# Altium PCB TutorialBoard.PcbDoc
Units mil, origin at the board's own origin, x right, y up, seen from the top; angles counter-clockwise.
Board outline 1775 x 1775 mil, 2 copper layers (Top Layer, Bottom Layer); 18 components, 14 nets, 50 pads, 0 vias.
Unrouted connection lines stored in the file: 3.
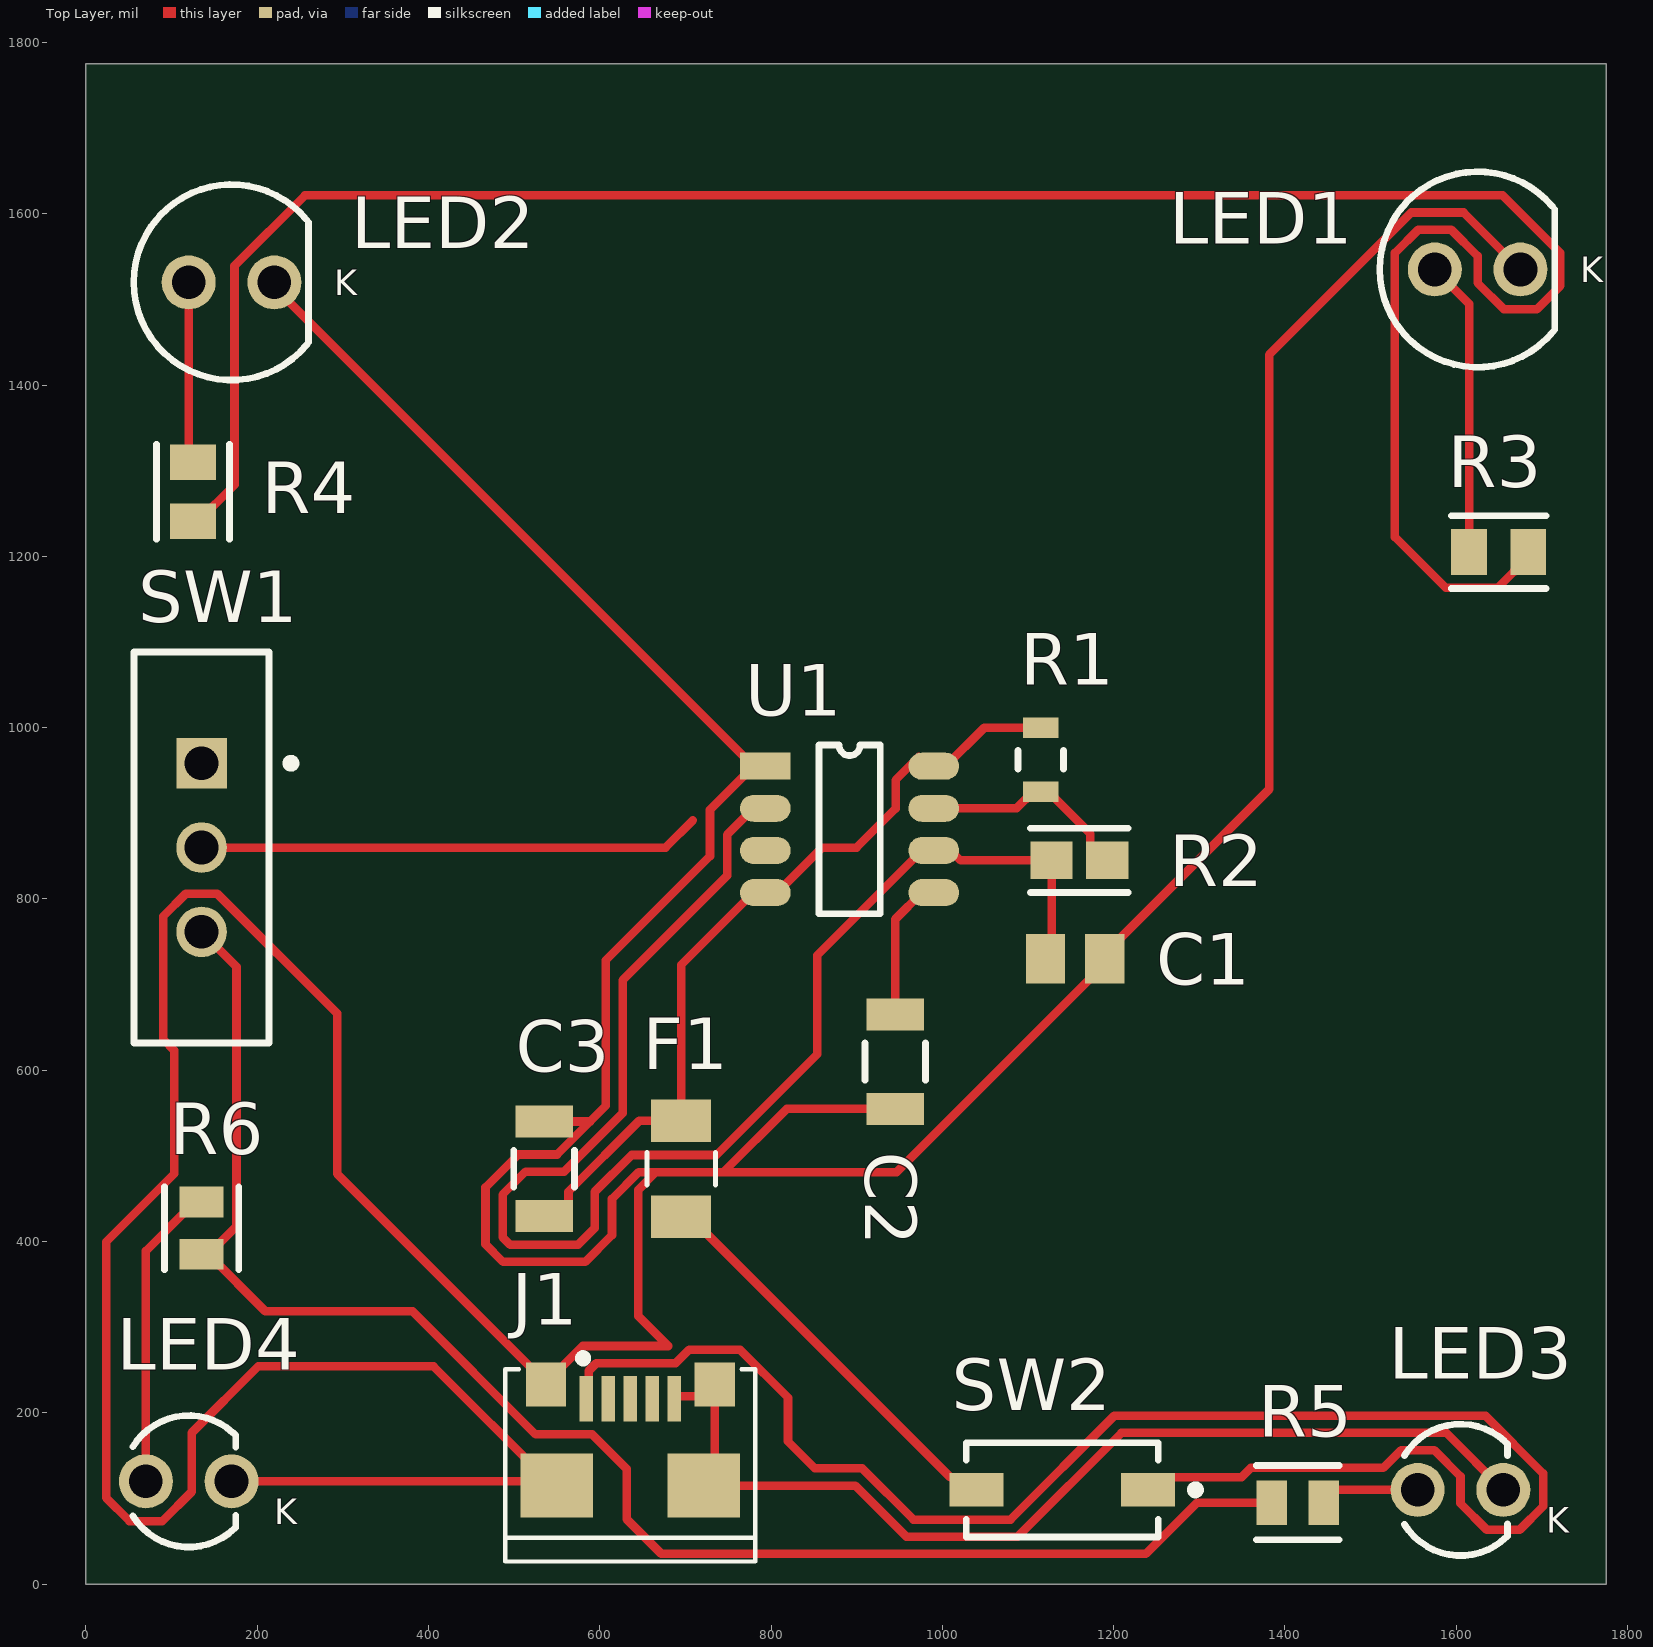
[diagram p0: Top Layer view]
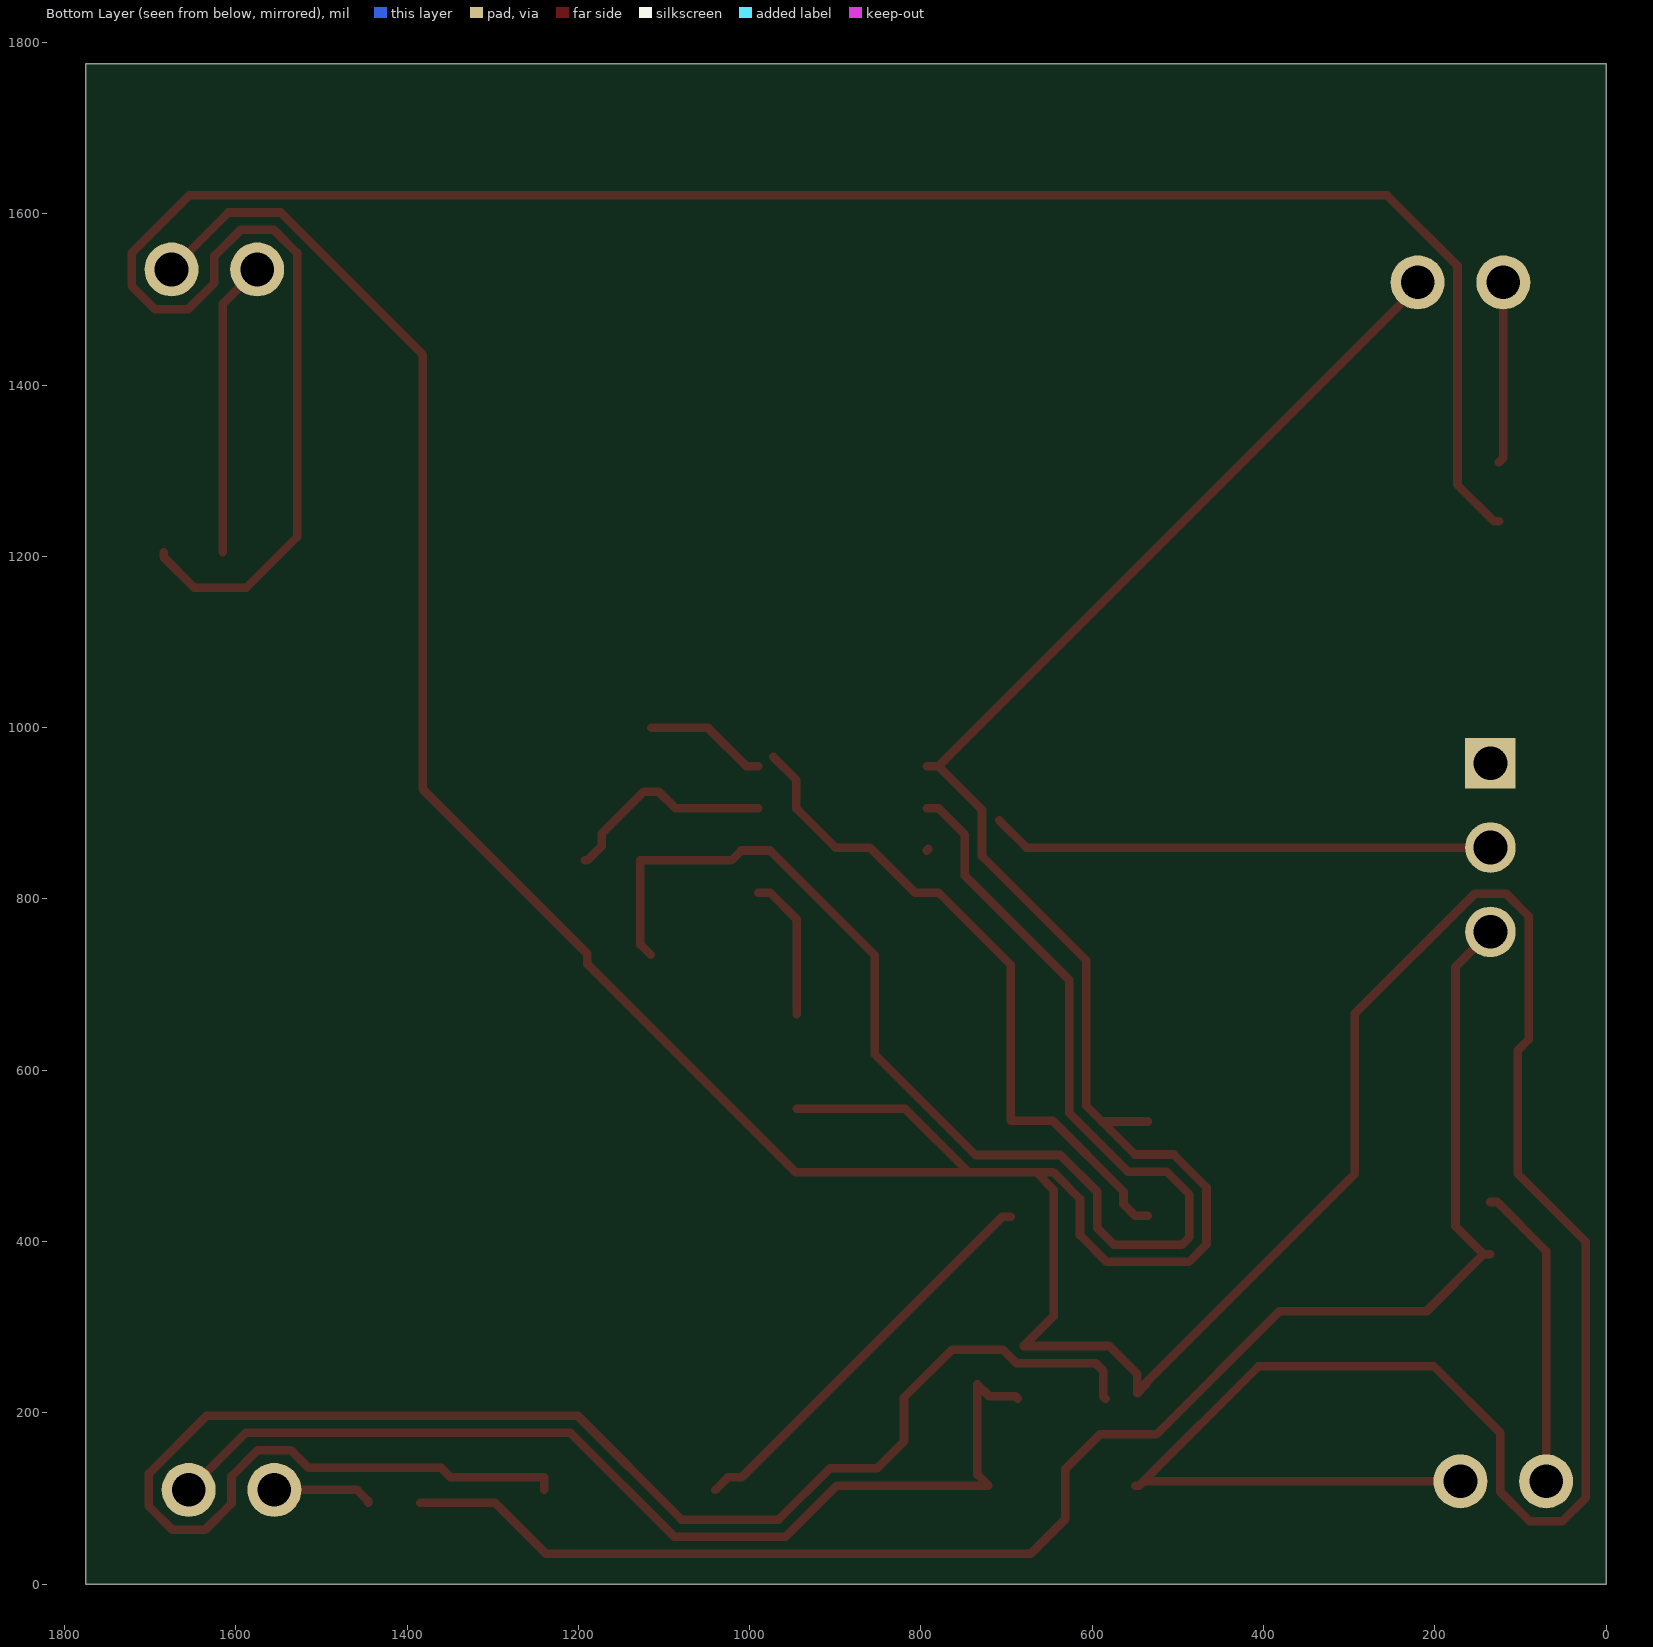
[diagram p1: Bottom Layer view, seen from below]
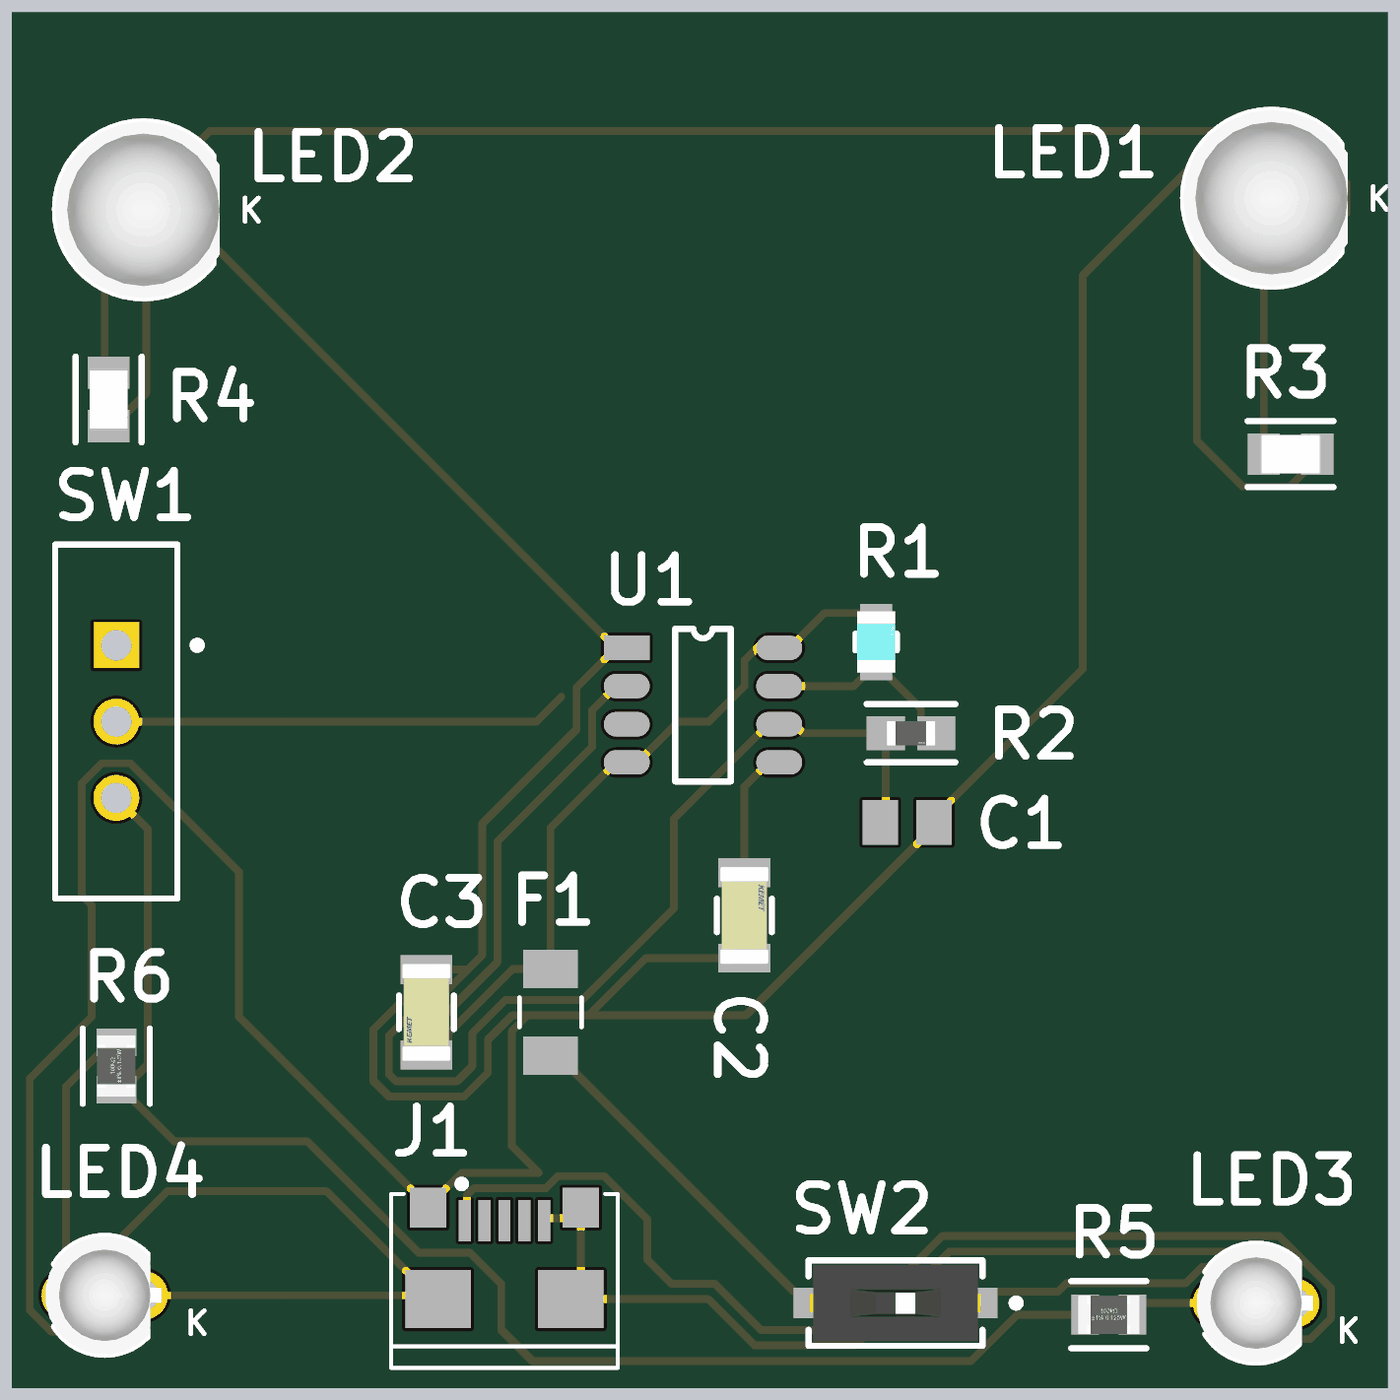
[diagram p2: 3D render of the assembled board from above, using the file's embedded part models]

## Layer stack, top to bottom
Top Solder: solder mask 0.4, Solder Resist, Dk 3.5
Top Layer: signal copper 1.4
Dielectric 1: dielectric 12.6, FR-4, Dk 4.8
Bottom Layer: signal copper 1.4
Bottom Solder: solder mask 0.4, Solder Resist, Dk 3.5

## Board outline
0,0 0,1775 1775,1775 1775,0

## Design rules (kind name [scope] priority, off if disabled: settings)
Clearance [All] p1: gap=10 ignorepadtopadclearanceinfootprint=FALSE except(0: Arc-Hole Track-Hole SMDPad-Hole THPad-Hole Via-Hole Fill-Hole Poly-Hole Region-Hole Text-Hole)
PolygonConnect [All] p1: connectstyle=Relief reliefconductorwidth=10 reliefentries=4 polygonreliefangle="90 Angle" airgapwidth=10
RoutingVias [All] p1: holewidth=28 width=50 viastyle="Through Hole" minholewidth=28 minwidth=50 maxholewidth=28 maxwidth=50
SolderMaskExpansion [All] p1: expansion=4 istentingtop=FALSE
Width [All] p1: maxlimit=10 minlimit=10 preferedwidth=10
30 further rules are at their usual default settings.

## Classes and differential pairs
component class Power: C3 F1 J1 SW2
component class 555_timer: C1 C2 LED1 LED2 LED3 LED4 R1 R2 R3 R4 R5 R6 SW1 U1

## Components (designator, comment, footprint, x,y, rotation, side; value= is the part's Value field where it differs from the comment)
C1 "6.8uF 0805 Capacitor" "Genetic 0805 Capacitor" 1155,730 r180 top value=6.8uF
C2 "C1206C103K5RAC7210" FP-C1206C-EB-MFG 945,610 r270 top value="10,000 pF"
C3 "C1206C103K5RAC7210" FP-C1206C-EB-MFG 535,485 r90 top value="10,000 pF"
F1 "C1F 250" C1_BEL 695,485 r90 top
J1 "DX4R005HJ5R2000" JAE_DX4R005HJ5R2000 635.63,216.38 r0 top
LED1 "151051BS04000" "Type 5mm" 1625,1535 r0 top
LED2 "151051BS04000" "Type 5mm" 170,1520 r0 top
LED3 "151031VS06000" "Type 3mm" 1605,110 r0 top
LED4 "151031VS06000" "Type 3mm" 120,120 r0 top
R1 "RK73H2ATTE1001F" FP-RK73H2A-MFG 1115,962.6 r90 top
R2 "RR0816P-104-D" FP-RR0816-IPC_A 1160,845 r0 top
R3 "CR0805-JW-101ELF" FP-CR0805-IPC_B 1649.53,1205 r180 top
R4 "CR0805-JW-101ELF" FP-CR0805-IPC_B 125,1275.47 r90 top
R5 "CRGCQ0805F120R" FP-CRGCQ0805-IPC_C 1415,95 r0 top value=120Ω
R6 "CRGCQ0805F120R" FP-CRGCQ0805-IPC_C 135,415.55 r90 top value=120Ω
SW1 "EG1218" ESWI-EG1218_V 135,860 r270 top
SW2 "CHS-01TA" FP-CHS-01TA-MFG 1140,110 r180 top
U1 "NE555S-13" NE555S-13 793.35,955 r0 top

## Footprints (in the part's own frame and the unit in brackets; to place one, negate y for a bottom-side part, rotate by r counter-clockwise, add the part's x,y. Pads: shape width x height; smd on the part's side, far side on the other; paste and mask are expansions set on the pad)
C1_BEL [mil]
  rect 50x70 smd paste+0 mask+0: 1(-56,0) 2(56,0)
  silkscreen extent -19,-40 19,40
ESWI-EG1218_V [mm] "THD, 3-Leads, Body 11.6x4mm, Pitch 2.5mm"
  rect 1.5x1.5 hole 1: 1(-2.5,0)
  round 1.5 hole 1: 2(0,0) 3(2.5,0)
  silkscreen extent -5.8,-2 5.8,2.78, body extent -5.8,-2 5.8,2, height 7.4
FP-C1206C-EB-MFG [mm]
  rect 0.95x1.7 smd paste+0 mask+0: 1(-1.4,0) 2(1.4,0)
  silkscreen extent -0.55,-0.9 0.55,0.9, body extent -2,-1 2,1, height 0.25
FP-CHS-01TA-MFG [mm]
  rect 1.6x1 smd paste+0 mask+0: 1(-2.54,0) 2(2.54,0)
  silkscreen extent -4.08,-1.4 2.85,1.4, body extent -3.44,-1.5 3.44,1.5, height 0.25
FP-CR0805-IPC_B [mil]
  rect 41.66x53.63 smd paste+0 mask+0: 1(-34.53,0) 2(34.53,0)
  silkscreen extent -55,-43 55,43, body extent -65,-37 65,37, height 10
FP-CRGCQ0805-IPC_C [mil]
  rect 35.67x51.57 smd paste+0 mask+0: 1(-30.55,0) 2(30.55,0)
  silkscreen extent -48,-43 48,43, body extent -52,-31 52,31, height 10
FP-RK73H2A-MFG [mm]
  rect 0.6x1.05 smd paste+0 mask+0: 1(-0.95,0) 2(0.95,0)
  silkscreen extent -0.28,-0.67 0.28,0.67, body extent -1.35,-0.77 1.35,0.77, height 0.25
FP-RR0816-IPC_A [mil]
  rect 49.41x43.55 smd paste+0 mask+0: 1(-32.51,0) 2(32.51,0)
  silkscreen extent -57,-38 57,38, body extent -77,-41 77,41, height 10
"Genetic 0805 Capacitor" [mm]
  rect 1.16x1.47 smd: 1(-0.88,0) 2(0.88,0)
JAE_DX4R005HJ5R2000 [mm]
  rect 0.4x1.35 smd: 1(-1.3,0) 2(-0.65,0) 3(0,0) 4(0.65,0) 5(1.3,0)
  rect 1.2x1.3 smd: SH1(-2.5,0.425) SH2(2.5,0.425)
  rect 2.15x1.9 smd: SH3(-2.175,-2.575) SH4(2.175,-2.575)
  silkscreen extent -3.71,-4.82 3.71,1.32
NE555S-13 [mm]
  rect 1.505x0.802 smd: 1(0,0)
  oval 1.505x0.802 smd: 2(0,-1.25) 3(0,-2.5) 4(0,-3.75) 5(4.995,-3.75) 6(4.995,-2.5) 7(4.995,-1.25) 8(4.995,0)
  silkscreen extent 1.59,-4.38 3.41,0.63
"Type 3mm" [mm] "THT, LED-3mm, 2pin- Body 4.15mm(max)"
  round 1.6 hole 1: 1(1.27,0) 2(-1.27,0)
  silkscreen extent -1.66,-1.95 1.4,1.95, body extent -1.93,-1.94 1.87,1.94, height 10.5
"Type 5mm" [mm] "THT, LED-5mm, 2pin- Body 5.8mm"
  round 1.6 hole 1: 1(1.27,0) 2(-1.27,0)
  silkscreen extent -2.9,-2.9 2.29,2.9, body extent -2.9,-2.9 2.5,2.9, height 11.7

## Part data
C1: "CAP CER 6.8UF 10V X7S 0805", Package=0805, Supplier Part Number 1=445-16116-1-ND, MF="TDK Corporation", MP=CGA4J3X7S1A685K125AB, Supplier 1=Digi-Key
C2 C3: library part CMP-03020-021901-1, "CAP CER 10000PF 50V X7R 1206", Capacitance="10,000 pF", Manufacturer=KEMET, Package=C1206C-EB, Temperature="-55°C to +150°C", Temperature Characteristic=X7R, Temperature Coefficient=15%, Temperature Range High=+150°C, Temperature Range Low=-55°C, Tolerance=0.1, Voltage Rating="50 V", Automotive=Yes, Automotive Grade="Grade 0", Category=Cap, ComponentLink2Description=Datasheet, ComponentLink2URL=https://content.kemet.com/datasheets/KEM_C1007_X8R_ULTRA_150C_SMD.pdf, Device Class L1="Passive Components", Device Class L2=Capacitors, Device Class L3="Ceramic Capacitors", Digikey Description="CAP CER 10000PF 50V X7R 1206", Height=0.88mm, Ipc Land Pattern Name=CAPC320160X78, Lead Free=Yes, Manufacturer Part Number=C1206C103K5RAC7210, Material=Ceramic, Mouser Description="Multilayer Ceramic Capacitors MLCC - SMD/SMT 50volts 10000pF X7R 10%", Octopart=https://octopart.com/c1206c103k5rac7210-kemet-3918401, RoHS=TRUE
F1: "No Description Available", Mfr_Name=Belfuse, Copyright="Copyright (C) 2022 Ultra Librarian. All rights reserved.", Digi-Key_Part_Number_1=507-1874-1-ND, Digi-Key_Part_Number_2=507-1874-2-ND, Digi-Key_Part_Number_3=507-1874-6-ND, Manufacturer_Part_Number="C1F 250", RefDes=RefDes, Type=DEV
J1: "USB - micro B USB 2.0 Receptacle Connector 5 Position Surface Mount, Right Angle", Package=None, Availability=Unavailable, MF="JAE Electronics", MP=DX4R005HJ5R2000, Price=None, SnapEDA_Link=https://www.snapeda.com/parts/DX4R005HJ5R2000/JAE%20Electronics/view-part/554854/?ref=snap
LED1 LED2: library part CMP-1488-00009-1, "THT LED round mono-color color lens, WL-TMRW, Blue", Emitting color=Blue, Manufacturer="Wuerth Elektronik", ComponentLink1Description="Manufacturer URL", ComponentLink1URL=http://www.we-online.com, ComponentLink2Description=Datasheet, ComponentLink2URL=http://katalog.we-online.de/pbs/datasheet/7448042001.pdfhttp://katalog.we-online.de/pbs/datasheet/7448042001.pdfhttp://katalog.we-online.de/pbs/datasheet/7448042001.pdfhttp://katalog.we-online.de/pbs/datasheet/151051BS04000.pdf, PackageReference="Type 5mm", PartNumber=151051BS04000
LED3 LED4: library part CMP-1488-00004-1, "THT LED round mono-color color lens, WL-TMRC , Bright Green", Emitting color="Bright Green", Manufacturer="Wuerth Elektronik", ComponentLink1Description="Manufacturer URL", ComponentLink1URL=http://www.we-online.com, ComponentLink2Description=Datasheet, ComponentLink2URL=http://katalog.we-online.de/pbs/datasheet/7448042001.pdfhttp://katalog.we-online.de/pbs/datasheet/7448042001.pdfhttp://katalog.we-online.de/pbs/datasheet/7448042001.pdfhttp://katalog.we-online.de/pbs/datasheet/151031VS06000.pdf, PackageReference="Type 3mm", PartNumber=151031VS06000
R1: library part CMP-2001-01881-2, "1kΩ ±1% 0.25W Chip Resistor 0805 Thick Film AEC-Q200 Qualified", Case Code (Imperial)=0805, Case Code (Metric)=2012, Manufacturer Series=RK73H, Max Operating Temperature=155°C, Min Operating Temperature=-55°C, Package Quantity=4000, Package Shape=Rectangular, Power Rating=125mW, Resistance=1kR, Resistor Type="Thick Film", Temperature Coefficient=100ppm/°C, Tolerance=1%, Voltage Rating=150V, Additional Feature=PRECISION, Case/Package=0805, Construction=Rectangular, Depth=1.25mm, Height=0.5mm, Lead Free="Lead Free", Length=2mm, Military Standard=Not, Packaging="Tape and Reel", RoHS Compliant=Yes, Series=RK73H, Size Code=0805, Technology="METAL GLAZE/THICK FILM", Terminal Finish=Tin, Termination=SMD/SMT, Width=1.25mm, Working Voltage=150V
R2: library part CMP-2000-02426-2, "100kΩ ±0.5% 0.0625W 1/16W Chip Resistor 0603 (1608 Metric) Thin Film", Case Code (Imperial)=0603, Case Code (Metric)=1608, Max Operating Temperature=125°C, Max Power Dissipation=63mW, Min Operating Temperature=-55°C, Package Quantity=1, Resistance=100kR, Resistance Tolerance=0.5%, Resistor Type="Thin Film", Temperature Coefficient=25ppm/°C, Voltage Rating=75V, Case/Package=0603, Depth=0.8mm, Height=0.4mm, Lead Free="Lead Free", Length=1.6mm, Number of Pins=2, Number of Terminations=2, Packaging="Tape and Reel", Power Rating=63mW, RoHS Compliant=Yes, Series=RR, Technology="THIN FILM", Termination=SMD/SMT, Tolerance=0.5%, Voltage Rating (DC)=75V, Width=0.8mm, Working Voltage=75V
R3 R4: library part CMP-07231-002659-1, "Thick Film Chip Resistors 0805 100Ω 0.125W 5% 200ppm/°C", Case Code (Imperial)=0805, Case Code (Metric)=2012, Max Operating Temperature=155°C, Max Power Dissipation=125mW, Min Operating Temperature=-55°C, Package Quantity=1, Resistance=100R, Temperature Coefficient=200ppm/°C, Tolerance=5%, Voltage Rating=150V, Case/Package=0805, Composition="Thick Film", Contact Plating=Tin, Depth=1.25mm, Features="Moisture Resistant", Height=0.024inch, Length=2mm, Military Standard=Not, Mount="Surface Mount", Number of Terminations=2, Packaging="Tape and Reel", Power Rating=125mW, REACH SVHC="No SVHC", Termination=SMD/SMT, Thickness=508um, Voltage Rating (DC)=150V, Width=1.25mm
R5 R6: library part CMP-03211-008258-1, "CRGCQ 0805 120R 1%", Ambient Temperature Range High=+70°C, Manufacturer="TE Connectivity", Package=CRGCQ0805, Power Rating=0.125W, Resistance=120Ω, Temperature="-55°C to +155°C", Temperature Coefficient=±100ppm/°C, Temperature Range High=+155°C, Temperature Range Low=-55°C, Tolerance=0.01, Voltage Rating=150V, Automotive=Yes, Automotive Grade="Grade 473", Category=Res, ComponentLink2Description=Datasheet, ComponentLink2URL=https://www.te.com/commerce/DocumentDelivery/DDEController?Action=showdoc&DocId=Data+Sheet%7F1773204-3%7F1%7Fpdf%7FEnglish%7FENG_DS_1773204-3_1.pdf%7F4-2176341-482, Composition="Thick Film", Device Class L1="Passive Components", Device Class L2=Resistors, Device Class L3="Chip SMD Resistors", Digikey Description="CRGCQ 0805 120R 1%", Height=0.65mm, Ipc Land Pattern Name=RESC200125X55, Lead Free=Yes, Manufacturer Part Number=CRGCQ0805F120R, Octopart=https://octopart.com/crgcq0805f120r-te+connectivity-91018143, RoHS=TRUE, Series=CRGCQ
SW1: library part CMP-1696-00002-1, "Slide Switch, 500 V, -20 to 70 degC, 3-Pin THD, RoHS", Case\Package=SOT-23-5, Dropout Voltage="300 mV", Max Input Voltage="8 V", Max Operating Temperature="85 degC", Max Ouput Current="150 mA", Max Power Dissipation="250 mW", Min Input Voltage="4.3 V", Min Operating Temperature="-40 degC", Nominal Output Voltage="3.3 V", Package Quantity=3000, ComponentLink1Description="Manufacturer URL", ComponentLink1URL=http://www.e-switch.ch/en/, ComponentLink2Description=Datasheet, ComponentLink2URL=https://www.e-switch.com/system/asset/product_line/data_sheet/119/EG.pdf, DatasheetVersion=Oct-15, Height="1.3 mm", Length="3 mm", Mount="Surface Mount", Output Current="150 mA", Output Voltage="3.3 V", Outputs=1, PackageDescription="3-Pin Through Hole Device, Body 11.6 x 4 mm, Pitch 2.5 mm", PackageReference=EG1218, Packaging="Tape and Reel", Pins=5, Power Rating="250 mW", Radiation Hardening=No, REACH SVHC="No SVHC", RoHSCompliant=true, Width="1.8 mm"
SW2: library part CMP-71740-000003-1, "SWITCH SLIDE DIP SPST 100MA 6V", Contact Current Rating=100mA, Contact Resistance=50mΩ, Manufacturer="Nidec Copal Electronics", Temperature="-40°C to +85°C", Temperature Range High=+85°C, Temperature Range Low=-40°C, Voltage Rating Dc=6V, Automotive=No, Category=Switch, ComponentLink2Description=Datasheet, ComponentLink2URL=https://www.nidec-copal-electronics.com/e/catalog/switch/chs.pdf, Device Class L1=Electromechanical, Device Class L2=Switches, Device Class L3="DIP Switches", Digikey Description="SWITCH SLIDE DIP SPST 100MA 6V", Electromechanical Life=2000Cycles, Height=2.5mm, Lead Free=Yes, Manufacturer Part Number=CHS-01TA, Mount="Surface Mount", Number Of Circuits=1, Octopart=https://octopart.com/chs-01ta-nidec+copal-52304644, Package=CHS-01TA, RoHS=TRUE, Standoff Height=0mm, Throw Configuration=SPST
U1: "IC OSC SINGLE TIMER 500KHZ 8SO", Supplier Part Number 1=NE555S-13DICT-ND, Supplier 1=Digi-Key

## Nets (pads, with @x,y where several pads share a name; then routed paths per layer and width w, separated by ;. In a path a pad name is that pad's centre, name@x,y a point inside that pad or via, vN(x,y) a via of type N, cw(c..) or ccw(c..) an arc to the next point about the centre after c; other vN are vias at no path point)
+5: C3.1 F1.2 R1.2 U1.4 U1.8 | length 937.7
  Top Layer w10: C3.1 549.76,429.88 563.46,443.58 563.46,458.35 646.12,541 F1.2 695,722.85 779.51,807.36 807.19,807.36 859.8,859.98 899.8,859.98 945.37,905.55 945.37,938.75 U1.8@972.41,965.79 ; U1.8 1003.84,955 1048.84,1000 R1.2
GND: C1.1 C2.2 C3.2 J1.5 J1.SH1 J1.SH2 J1.SH3 J1.SH4 LED1.1 LED2.1 LED3.1 LED4.1 U1.1 | length 8117.8
  Top Layer w10: LED4.1 J1.SH3@540.08,120 ; LED2.1 220,1514.51 U1.1@779.51,955 ; C3.2 588.67,540.12 ; J1.SH3 545.08,115 J1.SH3@540.08,120 ; J1.5 689.68,219.25 720.2,219.25 J1.SH2 734.06,127.8 J1.SH4 898.3,115 957.99,55.31 1087.85,55.31 1209.03,176.5 1588.5,176.5 LED3.1 ; U1.1 U1.1@779.51,955 ; C2.2 818.38,554.88 744.5,481 ; LED1.1 1608.5,1601.5 1547.46,1601.5 1381.61,1435.65 1381.61,928.07 1189.65,736.1 C1.1 1189.65,723.9 946.75,481 744.5,481 ; J1.SH3@540.08,120 405.9,254.18 200.99,254.18 123.5,176.69 123.5,107.75 89.26,73.5 50.74,73.5 23.5,100.74 23.5,399.45 103,478.94 103,623.22 90.47,635.75 90.47,780.02 116.56,806.1 153.44,806.1 293.34,666.21 293.34,478.94 537.2,235.08 J1.SH1 547.43,222.88 547.43,245.31 580.08,277.95 680,277.95 645,312.95 645,460.21 665.79,481 ; 588.67,540.12 550.15,501.6 505.05,501.6 466.54,463.08 466.54,396.68 487.04,376.18 582.96,376.18 614.23,407.45 614.23,449.73 645.5,481 665.79,481 ; 588.67,540.12 606.83,558.28 606.83,728.11 728.72,850 728.72,904.21 U1.1@779.51,955 ; 665.79,481 744.5,481
NetC2_1: C2.1 U1.5 | length 169
  Top Layer w10: C2.1 945,776.2 976.16,807.36 U1.5
NetF1_1: F1.1 SW2.2 | length 477.1
  Top Layer w10: F1.1 705,429 1009.31,124.69 1025.31,124.69 SW2.2
NetJ1_1: J1.1 SW2.1 | length 1944.8
  Top Layer w10: J1.1 587.17,219.09 587.17,249.17 595.95,257.95 624.13,257.95 688.47,257.95 704.22,273.7 763.89,273.7 819.8,217.79 819.8,166.52 851.32,135 906.59,135 966.27,75.31 1079.56,75.31 1200.75,196.5 1634.26,196.5 1701.5,129.26 1701.5,90.74 1674.26,63.5 1635.74,63.5 1605,94.24 1605,125.76 1574.26,156.5 1535.74,156.5 1515.03,135.78 1360.4,135.78 1349.3,124.69 1240,124.69 SW2.1
NetLED1_2: LED1.2 R3.2 | length 346.6
  Top Layer w10: LED1.2 1615,1495 R3.2
NetLED2_2: LED2.2 R4.2 | length 212.1
  Top Layer w10: LED2.2 120,1315 R4.2
NetLED3_2: LED3.2 R5.2 | length 116.9
  Top Layer w10: R5.2 1445.55,97.16 1458.39,110 LED3.2
NetLED4_2: LED4.2 R6.2 | length 357.7
  Top Layer w10: LED4.2 70,389.06 127.05,446.11 R6.2
NetR1_1: R1.1 R2.2 U1.7 | length 252.2
  Top Layer w10: U1.7 1086.73,905.79 1106.14,925.2 R1.1 1123.86,925.2 1172.8,876.25 1172.8,861.78 1189.58,845 R2.2
NetR3_1: R3.1 R4.1 SW1.1 | length 2775.5
  Top Layer w10: R4.1 130.98,1240.95 173.5,1283.47 173.5,1539.26 255.74,1621.5 1654.26,1621.5 1721.5,1554.26 1721.5,1515.74 1694.26,1488.5 1655.74,1488.5 1625,1519.24 1625,1550.76 1594.26,1581.5 1555.74,1581.5 1528.5,1554.26 1528.5,1222.64 1587.96,1163.19 1648.22,1163.19 1684.05,1199.02 R3.1
NetR5_1: R5.1 R6.1 SW1.3 | length 1860.6
  Top Layer w10: R6.1 R6.1@142.95,385 ; SW1.3 175.78,720.79 175.78,417.84 R6.1@142.95,385 ; R5.1 1297.39,95 1237.71,35.31 671.72,35.31 631.43,75.61 631.43,134.51 591.13,174.8 525.09,174.8 381.35,318.54 209.41,318.54 R6.1@142.95,385
OutPUT: SW1.2 U1.3 | length 591.8
  Top Layer w10: SW1.2@136.71,858.29 SW1.2 676.83,860 708.72,891.89 ; U1.3@791.63,858.29 U1.3
TRIG: C1.2 R2.1 U1.2 U1.6 | length 1709.9
  Top Layer w10: U1.2 779.51,905.79 748.72,875 748.72,827.15 626.83,705.27 626.83,550 558.43,481.6 513.34,481.6 486.54,454.8 486.54,404.97 495.32,396.18 574.68,396.18 594.23,415.74 594.23,458.01 637.22,501 736.21,501 854.08,618.87 854.08,734.5 976.16,856.57 U1.6 1009.68,856.57 1021.25,845 R2.1 1127.49,746.79 C1.2@1115.71,735
pads on no net: J1.2 J1.3 J1.4

## Text inside footprints (layer, text, board x,y; h text height)
LED1: Top Overlay "K" at 1745,1520 h30; Mechanical 15 "K" at 1745,1520 h30
LED2: Top Overlay "K" at 290,1505 h30; Mechanical 15 "K" at 290,1505 h30
LED3: Top Overlay "K" at 1705,60 h30; Mechanical 15 "K" at 1705,60 h30
LED4: Top Overlay "K" at 220,70 h30; Mechanical 15 "K" at 220,70 h30